# Altium PCB WS2812B灯板.PcbDoc (part 2 of 2)
Units mm, origin at the board's own origin, x right, y up, seen from the top; angles counter-clockwise.
Board outline 76.86 x 65 mm, 2 copper layers (Top Layer, Bottom Layer); 100 components, 337 nets, 606 pads, 0 vias.
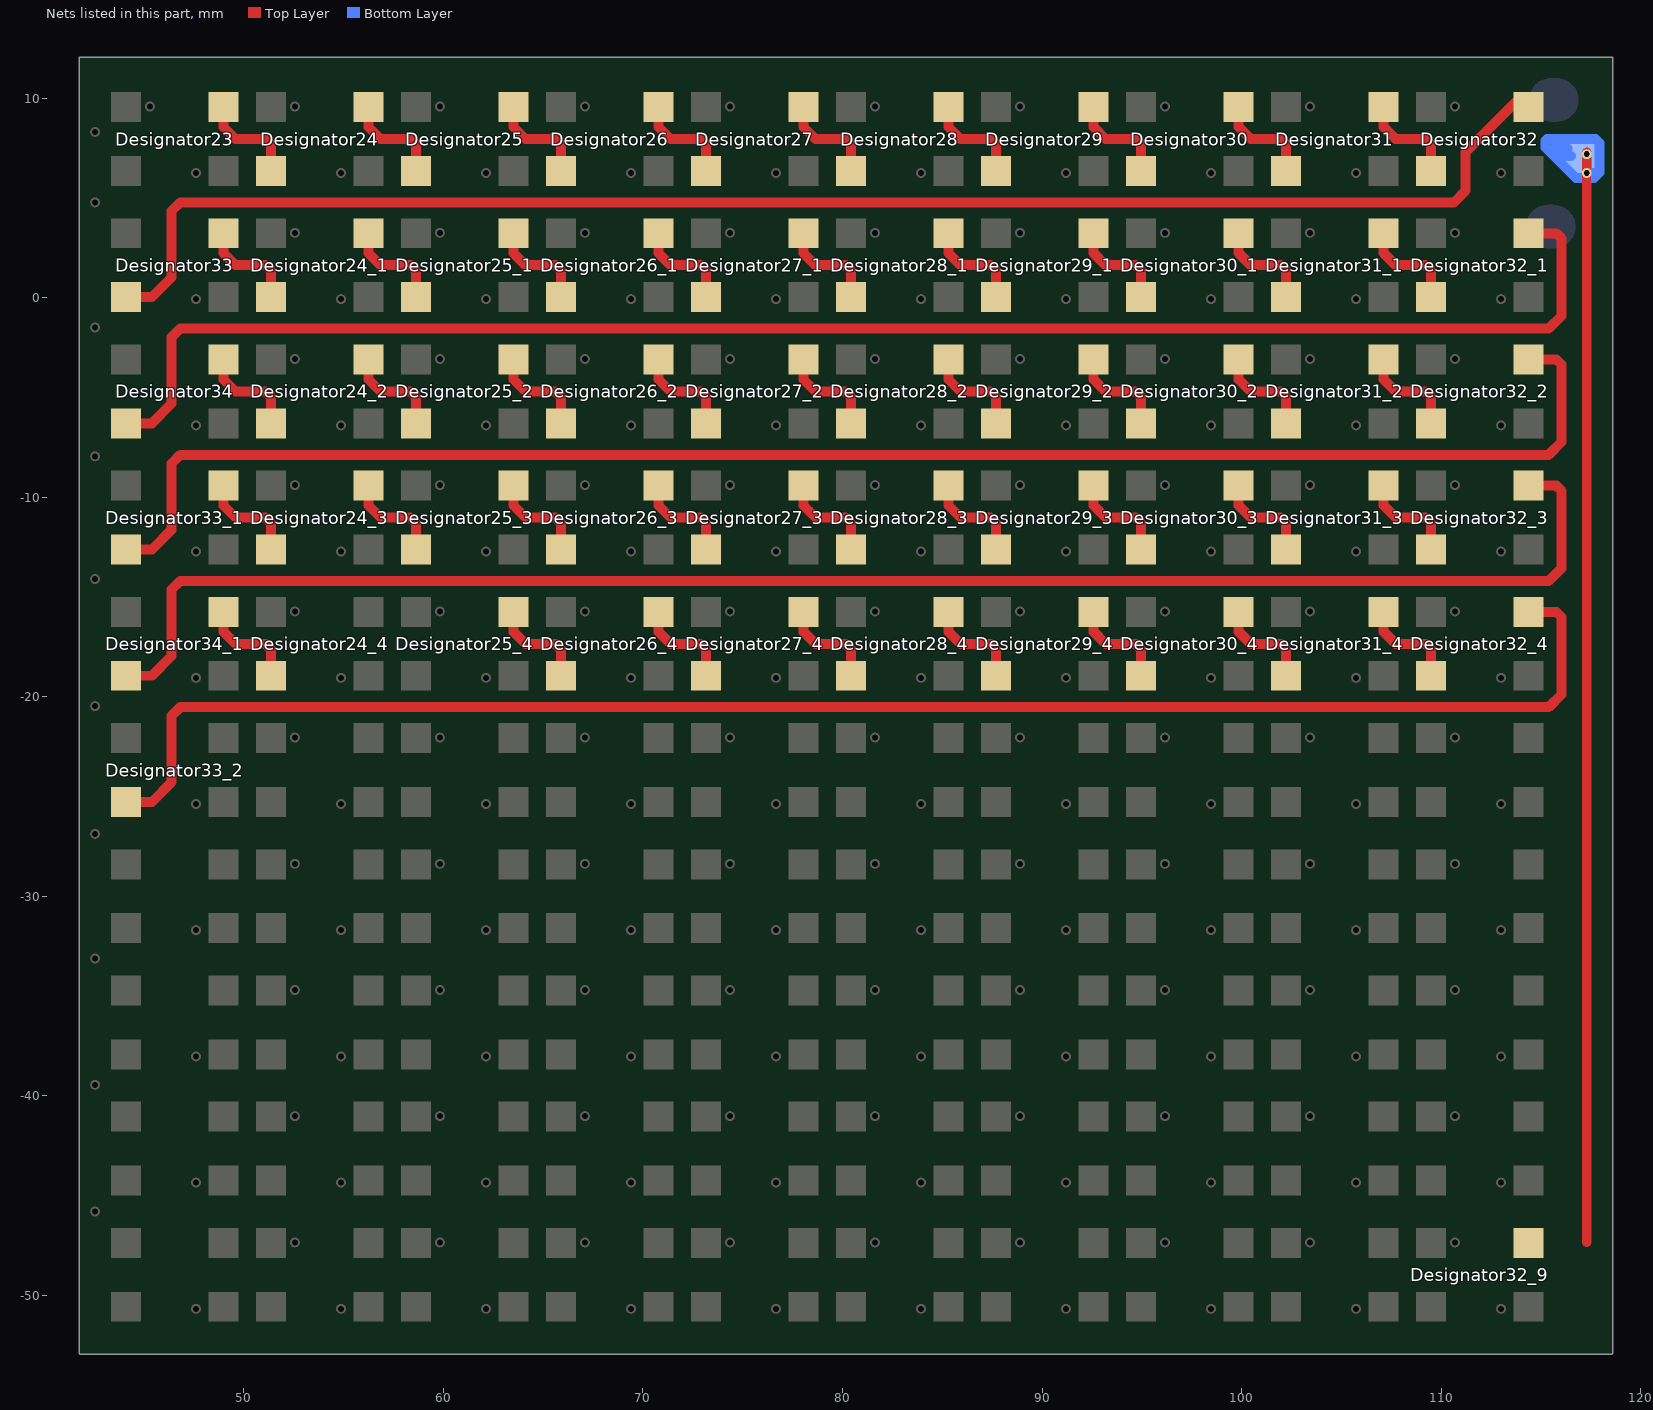
[diagram p2: the nets of this part, all layers, seen from the top]

## Nets (pads, with @x,y where several pads share a name; then routed paths per layer and width w, separated by ;. In a path a pad name is that pad's centre, name@x,y a point inside that pad or via, vN(x,y) a via of type N, cw(c..) or ccw(c..) an arc to the next point about the centre after c; other vN are vias at no path point) (continued)
NewNet67: Designator24_4.DOUT Designator34_1.DIN | length 5.1
  Top Layer w0.5: Designator34_1.DIN@48.983,-15.748 48.983,-16.747 49.584,-17.348 51.082,-17.348 51.35,-17.616 Designator24_4.DOUT@51.35,-18.948
NewNet68: Designator25_4.DIN Designator26_4.DOUT | length 5.1
  Top Layer w0.5: Designator25_4.DIN@63.517,-15.748 63.517,-16.747 64.118,-17.348 65.617,-17.348 65.884,-17.616 Designator26_4.DOUT@65.884,-18.948
NewNet69: Designator26_4.DIN Designator27_4.DOUT | length 5.1
  Top Layer w0.5: Designator26_4.DIN@70.784,-15.748 70.784,-16.747 71.385,-17.348 72.884,-17.348 73.152,-17.616 Designator27_4.DOUT@73.152,-18.948
NewNet70: Designator27_4.DIN Designator28_4.DOUT | length 5.1
  Top Layer w0.5: Designator27_4.DIN@78.052,-15.748 78.052,-16.747 78.653,-17.348 80.151,-17.348 80.419,-17.616 Designator28_4.DOUT@80.419,-18.948
NewNet71: Designator28_4.DIN Designator29_4.DOUT | length 5.1
  Top Layer w0.5: Designator28_4.DIN@85.319,-15.748 85.319,-16.747 85.92,-17.348 87.418,-17.348 87.686,-17.616 Designator29_4.DOUT@87.686,-18.948
NewNet72: Designator29_4.DIN Designator30_4.DOUT | length 5.1
  Top Layer w0.5: Designator29_4.DIN@92.586,-15.748 92.586,-16.747 93.187,-17.348 94.686,-17.348 94.953,-17.616 Designator30_4.DOUT@94.953,-18.948
NewNet73: Designator30_4.DIN Designator31_4.DOUT | length 5.1
  Top Layer w0.5: Designator30_4.DIN@99.853,-15.748 99.853,-16.747 100.454,-17.348 101.953,-17.348 102.221,-17.616 Designator31_4.DOUT@102.221,-18.948
NewNet74: Designator31_4.DIN Designator32_4.DOUT | length 5.1
  Top Layer w0.5: Designator31_4.DIN@107.121,-15.748 107.121,-16.747 107.721,-17.348 109.22,-17.348 109.488,-17.616 Designator32_4.DOUT@109.488,-18.948
NewNet75: Designator32_4.DIN Designator33_2.DOUT | length 81.8
  Top Layer w0.5: Designator33_2.DOUT@44.083,-25.273 45.39,-25.273 46.38,-24.282 46.38,-20.955 46.812,-20.523 115.392,-20.523 116.027,-19.888 116.027,-16.002 115.773,-15.748 Designator32_4.DIN@114.388,-15.748
NewNet76: Designator24_3.DIN Designator25_3.DOUT | length 5.1
  Top Layer w0.5: Designator24_3.DIN@56.25,-9.424 56.25,-10.423 56.851,-11.024 58.349,-11.024 58.617,-11.291 Designator25_3.DOUT@58.617,-12.624
NewNet77: Designator24_3.DOUT Designator33_1.DIN | length 5.1
  Top Layer w0.5: Designator33_1.DIN@48.983,-9.424 48.983,-10.423 49.584,-11.024 51.082,-11.024 51.35,-11.291 Designator24_3.DOUT@51.35,-12.624
NewNet78: Designator25_3.DIN Designator26_3.DOUT | length 5.1
  Top Layer w0.5: Designator25_3.DIN@63.517,-9.424 63.517,-10.423 64.118,-11.024 65.617,-11.024 65.884,-11.291 Designator26_3.DOUT@65.884,-12.624
NewNet79: Designator26_3.DIN Designator27_3.DOUT | length 5.1
  Top Layer w0.5: Designator26_3.DIN@70.784,-9.424 70.784,-10.423 71.385,-11.024 72.884,-11.024 73.152,-11.291 Designator27_3.DOUT@73.152,-12.624
NewNet80: Designator27_3.DIN Designator28_3.DOUT | length 5.1
  Top Layer w0.5: Designator27_3.DIN@78.052,-9.424 78.052,-10.423 78.653,-11.024 80.151,-11.024 80.419,-11.291 Designator28_3.DOUT@80.419,-12.624
NewNet81: Designator28_3.DIN Designator29_3.DOUT | length 5.1
  Top Layer w0.5: Designator28_3.DIN@85.319,-9.424 85.319,-10.423 85.92,-11.024 87.418,-11.024 87.686,-11.291 Designator29_3.DOUT@87.686,-12.624
NewNet82: Designator29_3.DIN Designator30_3.DOUT | length 5.1
  Top Layer w0.5: Designator29_3.DIN@92.586,-9.424 92.586,-10.423 93.187,-11.024 94.686,-11.024 94.953,-11.291 Designator30_3.DOUT@94.953,-12.624
NewNet83: Designator30_3.DIN Designator31_3.DOUT | length 5.1
  Top Layer w0.5: Designator30_3.DIN@99.853,-9.424 99.853,-10.423 100.454,-11.024 101.953,-11.024 102.221,-11.291 Designator31_3.DOUT@102.221,-12.624
NewNet84: Designator31_3.DIN Designator32_3.DOUT | length 5.1
  Top Layer w0.5: Designator31_3.DIN@107.121,-9.424 107.121,-10.423 107.721,-11.024 109.22,-11.024 109.488,-11.291 Designator32_3.DOUT@109.488,-12.624
NewNet85: Designator32_3.DIN Designator34_1.DOUT | length 81.8
  Top Layer w0.5: Designator34_1.DOUT@44.083,-18.948 45.39,-18.948 46.38,-17.958 46.38,-14.63 46.812,-14.199 115.392,-14.199 116.027,-13.564 116.027,-9.677 115.773,-9.424 Designator32_3.DIN@114.388,-9.424
NewNet86: Designator24_2.DIN Designator25_2.DOUT | length 5.1
  Top Layer w0.5: Designator24_2.DIN@56.25,-3.099 56.25,-4.098 56.851,-4.699 58.349,-4.699 58.617,-4.967 Designator25_2.DOUT@58.617,-6.299
NewNet87: Designator24_2.DOUT Designator34.DIN | length 5.1
  Top Layer w0.5: Designator34.DIN@48.983,-3.099 48.983,-4.098 49.584,-4.699 51.082,-4.699 51.35,-4.967 Designator24_2.DOUT@51.35,-6.299
NewNet88: Designator25_2.DIN Designator26_2.DOUT | length 5.1
  Top Layer w0.5: Designator25_2.DIN@63.517,-3.099 63.517,-4.098 64.118,-4.699 65.617,-4.699 65.884,-4.967 Designator26_2.DOUT@65.884,-6.299
NewNet89: Designator26_2.DIN Designator27_2.DOUT | length 5.1
  Top Layer w0.5: Designator26_2.DIN@70.784,-3.099 70.784,-4.098 71.385,-4.699 72.884,-4.699 73.152,-4.967 Designator27_2.DOUT@73.152,-6.299
NewNet90: Designator27_2.DIN Designator28_2.DOUT | length 5.1
  Top Layer w0.5: Designator27_2.DIN@78.052,-3.099 78.052,-4.098 78.653,-4.699 80.151,-4.699 80.419,-4.967 Designator28_2.DOUT@80.419,-6.299
NewNet91: Designator28_2.DIN Designator29_2.DOUT | length 5.1
  Top Layer w0.5: Designator28_2.DIN@85.319,-3.099 85.319,-4.098 85.92,-4.699 87.418,-4.699 87.686,-4.967 Designator29_2.DOUT@87.686,-6.299
NewNet92: Designator29_2.DIN Designator30_2.DOUT | length 5.1
  Top Layer w0.5: Designator29_2.DIN@92.586,-3.099 92.586,-4.098 93.187,-4.699 94.686,-4.699 94.953,-4.967 Designator30_2.DOUT@94.953,-6.299
NewNet93: Designator30_2.DIN Designator31_2.DOUT | length 5.1
  Top Layer w0.5: Designator30_2.DIN@99.853,-3.099 99.853,-4.098 100.454,-4.699 101.953,-4.699 102.221,-4.967 Designator31_2.DOUT@102.221,-6.299
NewNet94: Designator31_2.DIN Designator32_2.DOUT | length 5.1
  Top Layer w0.5: Designator31_2.DIN@107.121,-3.099 107.121,-4.098 107.721,-4.699 109.22,-4.699 109.488,-4.967 Designator32_2.DOUT@109.488,-6.299
NewNet95: Designator32_2.DIN Designator33_1.DOUT | length 81.8
  Top Layer w0.5: Designator33_1.DOUT@44.083,-12.624 45.39,-12.624 46.38,-11.633 46.38,-8.306 46.812,-7.874 115.392,-7.874 116.027,-7.239 116.027,-3.353 115.773,-3.099 Designator32_2.DIN@114.388,-3.099
NewNet96: Designator24_1.DIN Designator25_1.DOUT | length 5.1
  Top Layer w0.5: Designator24_1.DIN@56.25,3.226 56.25,2.226 56.851,1.626 58.349,1.626 58.617,1.358 Designator25_1.DOUT@58.617,0.026
NewNet97: Designator24_1.DOUT Designator33.DIN | length 5.1
  Top Layer w0.5: Designator33.DIN@48.983,3.226 48.983,2.226 49.584,1.626 51.082,1.626 51.35,1.358 Designator24_1.DOUT@51.35,0.026
NewNet98: Designator25_1.DIN Designator26_1.DOUT | length 5.1
  Top Layer w0.5: Designator25_1.DIN@63.517,3.226 63.517,2.226 64.118,1.626 65.617,1.626 65.884,1.358 Designator26_1.DOUT@65.884,0.026
NewNet99: Designator26_1.DIN Designator27_1.DOUT | length 5.1
  Top Layer w0.5: Designator26_1.DIN@70.784,3.226 70.784,2.226 71.385,1.626 72.884,1.626 73.152,1.358 Designator27_1.DOUT@73.152,0.026
NewNet100: Designator27_1.DIN Designator28_1.DOUT | length 5.1
  Top Layer w0.5: Designator27_1.DIN@78.052,3.226 78.052,2.226 78.653,1.626 80.151,1.626 80.419,1.358 Designator28_1.DOUT@80.419,0.026
NewNet101: Designator28_1.DIN Designator29_1.DOUT | length 5.1
  Top Layer w0.5: Designator28_1.DIN@85.319,3.226 85.319,2.226 85.92,1.626 87.418,1.626 87.686,1.358 Designator29_1.DOUT@87.686,0.026
NewNet102: Designator29_1.DIN Designator30_1.DOUT | length 5.1
  Top Layer w0.5: Designator29_1.DIN@92.586,3.226 92.586,2.226 93.187,1.626 94.686,1.626 94.953,1.358 Designator30_1.DOUT@94.953,0.026
NewNet103: Designator30_1.DIN Designator31_1.DOUT | length 5.1
  Top Layer w0.5: Designator30_1.DIN@99.853,3.226 99.853,2.226 100.454,1.626 101.953,1.626 102.221,1.358 Designator31_1.DOUT@102.221,0.026
NewNet104: Designator31_1.DIN Designator32_1.DOUT | length 5.1
  Top Layer w0.5: Designator31_1.DIN@107.121,3.226 107.121,2.226 107.721,1.626 109.22,1.626 109.488,1.358 Designator32_1.DOUT@109.488,0.026
NewNet105: Designator32_1.DIN Designator34.DOUT | length 81.8
  Top Layer w0.5: Designator34.DOUT@44.083,-6.299 45.39,-6.299 46.38,-5.309 46.38,-1.981 46.812,-1.549 115.392,-1.549 116.027,-0.914 116.027,2.972 115.773,3.226 Designator32_1.DIN@114.388,3.226
NewNet106: Designator32.DIN Designator33.DOUT | length 76.9
  Top Layer w0.5: Designator33.DOUT@44.083,0.026 45.39,0.026 46.38,1.016 46.38,4.343 46.812,4.775 110.642,4.775 111.227,5.359 111.227,7.29 Designator32.DIN@113.792,9.855
NewNet107: Designator31.DIN Designator32.DOUT | length 5.1
  Top Layer w0.5: Designator31.DIN@107.121,9.55 107.121,8.551 107.721,7.95 109.22,7.95 109.488,7.682 Designator32.DOUT@109.488,6.35
NewNet108: Designator30.DIN Designator31.DOUT | length 5.1
  Top Layer w0.5: Designator30.DIN@99.853,9.55 99.853,8.551 100.454,7.95 101.953,7.95 102.221,7.682 Designator31.DOUT@102.221,6.35
NewNet109: Designator29.DIN Designator30.DOUT | length 5.1
  Top Layer w0.5: Designator29.DIN@92.586,9.55 92.586,8.551 93.187,7.95 94.686,7.95 94.953,7.682 Designator30.DOUT@94.953,6.35
NewNet110: Designator28.DIN Designator29.DOUT | length 5.1
  Top Layer w0.5: Designator28.DIN@85.319,9.55 85.319,8.551 85.92,7.95 87.418,7.95 87.686,7.682 Designator29.DOUT@87.686,6.35
NewNet111: Designator27.DIN Designator28.DOUT | length 5.1
  Top Layer w0.5: Designator27.DIN@78.052,9.55 78.052,8.551 78.653,7.95 80.151,7.95 80.419,7.682 Designator28.DOUT@80.419,6.35
NewNet112: Designator26.DIN Designator27.DOUT | length 5.1
  Top Layer w0.5: Designator26.DIN@70.784,9.55 70.784,8.551 71.385,7.95 72.884,7.95 73.152,7.682 Designator27.DOUT@73.152,6.35
NewNet113: Designator25.DIN Designator26.DOUT | length 5.1
  Top Layer w0.5: Designator25.DIN@63.517,9.55 63.517,8.551 64.118,7.95 65.617,7.95 65.884,7.682 Designator26.DOUT@65.884,6.35
NewNet114: Designator24.DIN Designator25.DOUT | length 5.1
  Top Layer w0.5: Designator24.DIN@56.25,9.55 56.25,8.551 56.851,7.95 58.349,7.95 58.617,7.682 Designator25.DOUT@58.617,6.35
NewNet115: Designator23.DIN Designator24.DOUT | length 5.1
  Top Layer w0.5: Designator23.DIN@48.983,9.55 48.983,8.551 49.584,7.95 51.082,7.95 51.35,7.682 Designator24.DOUT@51.35,6.35
NewNet116: Designator32_9.DIN pad.3@117.018,7.137 pad.5 | length 64.6
  Top Layer w0.5: 117.297,-47.32 pad.5@117.297,7.264
  Bottom Layer w0.5: 115.621,7.468 pad.3@116.332,7.468 ; 115.875,7.087 pad.3@116.51,7.087 ; pad.5@117.297,6.248 117.907,6.248 ; 115.24,7.518 115.24,7.874 115.316,7.95 115.926,7.95 117.729,7.95 117.932,7.747 117.932,6.274 117.653,5.994 116.764,5.994 115.24,7.518
NewNet117: 
NewNet118: 
NewNet119: 
NewNet120: 
NewNet121: 
NewNet122: 
NewNet123: 
NewNet124: 
NewNet125: 
NewNet126: 
NewNet127: 
NewNet128: 
NewNet129: 
NewNet130: 
NewNet131: 
NewNet132: 
NewNet133: 
NewNet134: 
NewNet135: 
NewNet136: 
NewNet137: 
NewNet138: 
NewNet139: 
NewNet140: 
NewNet141: 
NewNet142: 
NewNet143: 
NewNet144: 
NewNet145: 
NewNet146: 
NewNet147: 
NewNet148: 
NewNet149: 
NewNet150: 
NewNet151: 
NewNet152: 
NewNet153: 
NewNet154: 
NewNet155: 
NewNet156: 
NewNet157: 
NewNet158: 
NewNet159: 
NewNet160: 
NewNet161: 
NewNet162: 
NewNet163: 
NewNet164: 
NewNet165: 
NewNet166: 
NewNet167: 
NewNet168: 
NewNet169: 
NewNet170: 
NewNet171: 
NewNet172: 
NewNet173: 
NewNet174: 
NewNet175: 
NewNet176: 
NewNet177: 
NewNet178: 
NewNet179: 
NewNet180: 
NewNet181: 
NewNet182: 
NewNet183: 
NewNet184: 
NewNet185: 
NewNet186: 
NewNet187: 
NewNet188: 
NewNet189: 
NewNet190: 
NewNet191: 
NewNet192: 
NewNet193: 
NewNet194: 
NewNet195: 
NewNet196: 
NewNet197: 
NewNet198: 
NewNet199: 
NewNet200: 
NewNet201: 
NewNet202: 
NewNet203: 
NewNet204: 
NewNet205: 
NewNet206: 
NewNet207: 
NewNet208: 
NewNet209: 
NewNet210: 
NewNet211: 
NewNet212: 
NewNet213: 
NewNet214: 
NewNet215: 
NewNet216: 
NewNet217: 
NewNet218: 
NewNet219: 
NewNet220: 
NewNet221: 
NewNet222: 
NewNet223: 
NewNet224: 
NewNet225: 
NewNet226: 
NewNet227: 
NewNet228: 
NewNet229: 
NewNet230: 
NewNet231: 
NewNet232: 
NewNet233: 
NewNet234: 
NewNet235: 
NewNet236: 
NewNet237: 
NewNet238: 
NewNet239: 
NewNet240: 
NewNet241: 
NewNet242: 
NewNet243: 
NewNet244: 
NewNet245: 
NewNet246: 
NewNet247: 
NewNet248: 
NewNet249: 
NewNet250: 
NewNet251: 
NewNet252: 
NewNet253: 
NewNet254: 
NewNet255: 
NewNet256: 
NewNet257: 
NewNet258: 
NewNet259: 
NewNet260: 
NewNet261: 
NewNet262: 
NewNet263: 
NewNet264: 
NewNet265: 
NewNet266: 
NewNet267: 
NewNet268: 
NewNet269: 
NewNet270: 
NewNet271: 
NewNet272: 
NewNet273: 
NewNet274: 
NewNet275: 
NewNet276: 
NewNet277: 
NewNet278: 
NewNet279: 
NewNet280: 
NewNet281: 
NewNet282: 
NewNet283: 
NewNet284: 
NewNet285: 
NewNet286: 
NewNet287: 
NewNet288: 
NewNet289: 
NewNet290: 
NewNet291: 
NewNet292: 
NewNet293: 
NewNet294: 
NewNet295: 
NewNet296: 
NewNet297: 
NewNet298: 
NewNet299: 
NewNet300: 
NewNet301: 
NewNet302: 
NewNet303: 
NewNet304: 
NewNet305: 
NewNet306: 
NewNet307: 
NewNet308: 
NewNet309: 
NewNet310: 
NewNet311: 
NewNet312: 
NewNet313: 
NewNet314: 
NewNet315: 
NewNet316: 
NewNet317: 
NewNet318: 
NewNet319: 
NewNet320: 
NewNet321: 
NewNet322: 
NewNet323: 
NewNet324: 
NewNet325: 
NewNet326: 
NewNet327: 
NewNet328: 
NewNet329: 
NewNet330: 
NewNet331: 
NewNet332: 
NewNet333: 
NewNet334: 
NewNet335: 
NewNet336: 
NewNet337: 
pads on no net: Designator23.DOUT

## Other copper
Top Layer:
  rectangle net NewNet15: 109.423,8.788 111.379,10.338
  rectangle net NewNet15: 102.156,8.788 104.112,10.338
  rectangle net NewNet15: 94.889,8.788 96.845,10.338
  rectangle net NewNet15: 87.622,8.788 89.577,10.338
  rectangle net NewNet15: 80.354,8.788 82.31,10.338
  rectangle net NewNet15: 73.087,8.788 75.043,10.338
  rectangle net NewNet15: 65.82,8.788 67.776,10.338
  rectangle net NewNet15: 58.553,8.788 60.508,10.338
  rectangle net NewNet15: 51.285,8.788 53.241,10.338
  rectangle net NewNet15: 44.018,8.788 45.974,10.338
  rectangle net NewNet116: 114.478,-48.311 117.831,-46.736
  rectangle net NewNet18: 112.192,5.639 114.452,7.112
  rectangle net NewNet18: 104.925,5.639 107.185,7.112
  rectangle net NewNet18: 97.657,5.639 99.918,7.112
  rectangle net NewNet18: 90.39,5.639 92.651,7.112
  rectangle net NewNet18: 83.123,5.639 85.384,7.112
  rectangle net NewNet18: 75.856,5.639 78.116,7.112
  rectangle net NewNet18: 68.588,5.639 70.849,7.112
  rectangle net NewNet18: 61.321,5.639 63.582,7.112
  rectangle net NewNet18: 54.054,5.639 56.315,7.112
  rectangle net NewNet18: 47.117,5.639 49.047,7.112
  rectangle net NewNet18: 112.192,-0.686 114.452,0.787
  rectangle net NewNet18: 104.925,-0.686 107.185,0.787
  rectangle net NewNet18: 97.657,-0.686 99.918,0.787
  rectangle net NewNet18: 90.39,-0.686 92.651,0.787
  rectangle net NewNet18: 83.123,-0.686 85.384,0.787
  rectangle net NewNet18: 75.856,-0.686 78.116,0.787
  rectangle net NewNet18: 68.588,-0.686 70.849,0.787
  rectangle net NewNet18: 61.321,-0.686 63.582,0.787
  rectangle net NewNet18: 54.054,-0.686 56.315,0.787
  rectangle net NewNet18: 47.117,-0.686 49.047,0.787
  rectangle net NewNet18: 112.192,-7.01 114.452,-5.537
  rectangle net NewNet18: 104.925,-7.01 107.185,-5.537
  rectangle net NewNet18: 97.657,-7.01 99.918,-5.537
  rectangle net NewNet18: 90.39,-7.01 92.651,-5.537
  rectangle net NewNet18: 83.123,-7.01 85.384,-5.537
  rectangle net NewNet18: 75.856,-7.01 78.116,-5.537
  rectangle net NewNet18: 68.588,-7.01 70.849,-5.537
  rectangle net NewNet18: 61.321,-7.01 63.582,-5.537
  rectangle net NewNet18: 54.054,-7.01 56.315,-5.537
  rectangle net NewNet18: 47.117,-7.01 49.047,-5.537
  rectangle net NewNet18: 112.192,-13.335 114.452,-11.862
  rectangle net NewNet18: 104.925,-13.335 107.185,-11.862
  rectangle net NewNet18: 97.657,-13.335 99.918,-11.862
  rectangle net NewNet18: 90.39,-13.335 92.651,-11.862
  rectangle net NewNet18: 83.123,-13.335 85.384,-11.862
  rectangle net NewNet18: 75.856,-13.335 78.116,-11.862
  rectangle net NewNet18: 68.588,-13.335 70.849,-11.862
  rectangle net NewNet18: 61.321,-13.335 63.582,-11.862
  rectangle net NewNet18: 54.054,-13.335 56.315,-11.862
  rectangle net NewNet18: 47.117,-13.335 49.047,-11.862
  rectangle net NewNet18: 112.192,-19.66 114.452,-18.186
  rectangle net NewNet18: 104.925,-19.66 107.185,-18.186
  rectangle net NewNet18: 97.657,-19.66 99.918,-18.186
  rectangle net NewNet18: 90.39,-19.66 92.651,-18.186
  rectangle net NewNet18: 83.123,-19.66 85.384,-18.186
  rectangle net NewNet18: 75.856,-19.66 78.116,-18.186
  rectangle net NewNet18: 68.588,-19.66 70.849,-18.186
  rectangle net NewNet18: 61.321,-19.66 63.582,-18.186
  rectangle net NewNet18: 54.054,-19.66 56.315,-18.186
  rectangle net NewNet18: 47.117,-19.66 49.047,-18.186
  rectangle net NewNet18: 112.192,-25.984 114.452,-24.511
  rectangle net NewNet18: 104.925,-25.984 107.185,-24.511
  rectangle net NewNet18: 97.657,-25.984 99.918,-24.511
  rectangle net NewNet18: 90.39,-25.984 92.651,-24.511
  rectangle net NewNet18: 83.123,-25.984 85.384,-24.511
  rectangle net NewNet18: 75.856,-25.984 78.116,-24.511
  rectangle net NewNet18: 68.588,-25.984 70.849,-24.511
  rectangle net NewNet18: 61.321,-25.984 63.582,-24.511
  rectangle net NewNet18: 54.054,-25.984 56.315,-24.511
  rectangle net NewNet18: 47.117,-25.984 49.047,-24.511
  rectangle net NewNet18: 112.192,-32.309 114.452,-30.836
  rectangle net NewNet18: 104.925,-32.309 107.185,-30.836
  rectangle net NewNet18: 97.657,-32.309 99.918,-30.836
  rectangle net NewNet18: 90.39,-32.309 92.651,-30.836
  rectangle net NewNet18: 83.123,-32.309 85.384,-30.836
  rectangle net NewNet18: 75.856,-32.309 78.116,-30.836
  rectangle net NewNet18: 68.588,-32.309 70.849,-30.836
  rectangle net NewNet18: 61.321,-32.309 63.582,-30.836
  rectangle net NewNet18: 54.054,-32.309 56.315,-30.836
  rectangle net NewNet18: 47.117,-32.309 49.047,-30.836
  rectangle net NewNet18: 112.192,-38.633 114.452,-37.16
  rectangle net NewNet18: 104.925,-38.633 107.185,-37.16
  rectangle net NewNet18: 97.657,-38.633 99.918,-37.16
  rectangle net NewNet18: 90.39,-38.633 92.651,-37.16
  rectangle net NewNet18: 83.123,-38.633 85.384,-37.16
  rectangle net NewNet18: 75.856,-38.633 78.116,-37.16
  rectangle net NewNet18: 68.588,-38.633 70.849,-37.16
  rectangle net NewNet18: 61.321,-38.633 63.582,-37.16
  rectangle net NewNet18: 54.054,-38.633 56.315,-37.16
  rectangle net NewNet18: 47.117,-38.633 49.047,-37.16
  rectangle net NewNet18: 112.192,-51.283 114.452,-49.809
  rectangle net NewNet18: 104.925,-51.283 107.185,-49.809
  rectangle net NewNet18: 97.657,-51.283 99.918,-49.809
  rectangle net NewNet18: 90.39,-51.283 92.651,-49.809
  rectangle net NewNet18: 83.123,-51.283 85.384,-49.809
  rectangle net NewNet18: 75.856,-51.283 78.116,-49.809
  rectangle net NewNet18: 68.588,-51.283 70.849,-49.809
  rectangle net NewNet18: 61.321,-51.283 63.582,-49.809
  rectangle net NewNet18: 54.054,-51.283 56.315,-49.809
  rectangle net NewNet18: 47.117,-51.283 49.047,-49.809
  rectangle net NewNet18: 47.117,-44.958 49.047,-43.485
  rectangle net NewNet18: 54.054,-44.958 56.315,-43.485
  rectangle net NewNet18: 61.321,-44.958 63.582,-43.485
  rectangle net NewNet18: 68.588,-44.958 70.849,-43.485
  rectangle net NewNet18: 75.856,-44.958 78.116,-43.485
  rectangle net NewNet18: 83.123,-44.958 85.384,-43.485
  rectangle net NewNet18: 90.39,-44.958 92.651,-43.485
  rectangle net NewNet18: 97.657,-44.958 99.918,-43.485
  rectangle net NewNet18: 104.925,-44.958 107.185,-43.485
  rectangle net NewNet18: 112.192,-44.958 114.452,-43.485
  rectangle net NewNet15: 109.423,2.464 111.379,4.013
  rectangle net NewNet15: 102.156,2.464 104.112,4.013
  rectangle net NewNet15: 87.622,2.464 89.577,4.013
  rectangle net NewNet15: 80.354,2.464 82.31,4.013
  rectangle net NewNet15: 73.087,2.464 75.043,4.013
  rectangle net NewNet15: 65.82,2.464 67.776,4.013
  rectangle net NewNet15: 58.553,2.464 60.508,4.013
  rectangle net NewNet15: 51.285,2.464 53.241,4.013
  rectangle net NewNet15: 94.889,2.464 96.845,4.013
  rectangle net NewNet15: 109.423,-3.861 111.379,-2.311
  rectangle net NewNet15: 102.156,-3.861 104.112,-2.311
  rectangle net NewNet15: 87.622,-3.861 89.577,-2.311
  rectangle net NewNet15: 80.354,-3.861 82.31,-2.311
  rectangle net NewNet15: 73.087,-3.861 75.043,-2.311
  rectangle net NewNet15: 65.82,-3.861 67.776,-2.311
  rectangle net NewNet15: 58.553,-3.861 60.508,-2.311
  rectangle net NewNet15: 51.285,-3.861 53.241,-2.311
  rectangle net NewNet15: 94.889,-3.861 96.845,-2.311
  rectangle net NewNet15: 109.423,-10.185 111.379,-8.636
  rectangle net NewNet15: 102.156,-10.185 104.112,-8.636
  rectangle net NewNet15: 87.622,-10.185 89.577,-8.636
  rectangle net NewNet15: 80.354,-10.185 82.31,-8.636
  rectangle net NewNet15: 73.087,-10.185 75.043,-8.636
  rectangle net NewNet15: 65.82,-10.185 67.776,-8.636
  rectangle net NewNet15: 58.553,-10.185 60.508,-8.636
  rectangle net NewNet15: 51.285,-10.185 53.241,-8.636
  rectangle net NewNet15: 94.889,-10.185 96.845,-8.636
  rectangle net NewNet15: 109.423,-16.51 111.379,-14.961
  rectangle net NewNet15: 102.156,-16.51 104.112,-14.961
  rectangle net NewNet15: 87.622,-16.51 89.577,-14.961
  rectangle net NewNet15: 80.354,-16.51 82.31,-14.961
  rectangle net NewNet15: 73.087,-16.51 75.043,-14.961
  rectangle net NewNet15: 65.82,-16.51 67.776,-14.961
  rectangle net NewNet15: 58.553,-16.51 60.508,-14.961
  rectangle net NewNet15: 51.285,-16.51 53.241,-14.961
  rectangle net NewNet15: 94.889,-16.51 96.845,-14.961
  rectangle net NewNet15: 109.423,-22.835 111.379,-21.285
  rectangle net NewNet15: 102.156,-22.835 104.112,-21.285
  rectangle net NewNet15: 87.622,-22.835 89.577,-21.285
  rectangle net NewNet15: 80.354,-22.835 82.31,-21.285
  rectangle net NewNet15: 73.087,-22.835 75.043,-21.285
  rectangle net NewNet15: 65.82,-22.835 67.776,-21.285
  rectangle net NewNet15: 58.553,-22.835 60.508,-21.285
  rectangle net NewNet15: 51.285,-22.835 53.241,-21.285
  rectangle net NewNet15: 94.889,-22.835 96.845,-21.285
  rectangle net NewNet15: 109.423,-29.159 111.379,-27.61
  rectangle net NewNet15: 102.156,-29.159 104.112,-27.61
  rectangle net NewNet15: 87.622,-29.159 89.577,-27.61
  rectangle net NewNet15: 80.354,-29.159 82.31,-27.61
  rectangle net NewNet15: 73.087,-29.159 75.043,-27.61
  rectangle net NewNet15: 65.82,-29.159 67.776,-27.61
  rectangle net NewNet15: 58.553,-29.159 60.508,-27.61
  rectangle net NewNet15: 51.285,-29.159 53.241,-27.61
  rectangle net NewNet15: 94.889,-29.159 96.845,-27.61
  rectangle net NewNet15: 109.423,-35.484 111.379,-33.934
  rectangle net NewNet15: 102.156,-35.484 104.112,-33.934
  rectangle net NewNet15: 87.622,-35.484 89.577,-33.934
  rectangle net NewNet15: 80.354,-35.484 82.31,-33.934
  rectangle net NewNet15: 73.087,-35.484 75.043,-33.934
  rectangle net NewNet15: 65.82,-35.484 67.776,-33.934
  rectangle net NewNet15: 58.553,-35.484 60.508,-33.934
  rectangle net NewNet15: 51.285,-35.484 53.241,-33.934
  rectangle net NewNet15: 94.889,-35.484 96.845,-33.934
  rectangle net NewNet15: 109.423,-41.808 111.379,-40.259
  rectangle net NewNet15: 102.156,-41.808 104.112,-40.259
  rectangle net NewNet15: 87.622,-41.808 89.577,-40.259
  rectangle net NewNet15: 80.354,-41.808 82.31,-40.259
  rectangle net NewNet15: 73.087,-41.808 75.043,-40.259
  rectangle net NewNet15: 65.82,-41.808 67.776,-40.259
  rectangle net NewNet15: 58.553,-41.808 60.508,-40.259
  rectangle net NewNet15: 51.285,-41.808 53.241,-40.259
  rectangle net NewNet15: 94.889,-41.808 96.845,-40.259
  rectangle net NewNet15: 94.889,-48.133 96.845,-46.584
  rectangle net NewNet15: 51.285,-48.133 53.241,-46.584
  rectangle net NewNet15: 58.553,-48.133 60.508,-46.584
  rectangle net NewNet15: 65.82,-48.133 67.776,-46.584
  rectangle net NewNet15: 73.087,-48.133 75.043,-46.584
  rectangle net NewNet15: 80.354,-48.133 82.31,-46.584
  rectangle net NewNet15: 87.622,-48.133 89.577,-46.584
  rectangle net NewNet15: 102.156,-48.133 104.112,-46.584
  rectangle net NewNet15: 109.423,-48.133 111.379,-46.584
  rectangle net NewNet15: 50.6,8.992 52.022,11.303
  rectangle net NewNet15: 57.867,8.992 59.289,11.303
  rectangle net NewNet15: 65.134,8.992 66.556,11.303
  rectangle net NewNet15: 72.401,8.992 73.824,11.303
  rectangle net NewNet15: 79.669,8.992 81.091,11.303
  rectangle net NewNet15: 86.936,8.992 88.358,11.303
  rectangle net NewNet15: 94.203,8.992 95.625,11.303
  rectangle net NewNet15: 101.47,8.992 102.893,11.303
  rectangle net NewNet15: 108.737,8.992 110.16,11.303
  rectangle net NewNet15: 42.342,8.814 44.78,11.176
  rectangle net NewNet15: 42.342,2.489 44.78,4.039
  rectangle net NewNet15: 42.342,-3.835 44.78,-2.286
  rectangle net NewNet15: 42.342,-10.16 44.78,-8.611
  rectangle net NewNet15: 42.342,-16.485 44.78,-14.935
  rectangle net NewNet15: 42.342,-22.809 44.78,-21.26
  rectangle net NewNet15: 42.342,-29.134 44.78,-27.584
  rectangle net NewNet15: 42.342,-35.458 44.78,-33.909
  rectangle net NewNet15: 42.342,-41.783 44.78,-40.234
  rectangle net NewNet15: 42.342,-48.108 44.78,-46.558
  rectangle net NewNet18: 48.263,-52.4 49.711,-49.86
  rectangle net NewNet18: 55.53,-52.375 56.978,-49.835
  rectangle net NewNet18: 62.797,-52.375 64.245,-49.835
  rectangle net NewNet18: 70.064,-52.375 71.512,-49.835
  rectangle net NewNet18: 77.332,-52.375 78.78,-49.835
  rectangle net NewNet18: 84.599,-52.375 86.047,-49.835
  rectangle net NewNet18: 91.866,-52.375 93.314,-49.835
  rectangle net NewNet18: 99.133,-52.375 100.581,-49.835
  rectangle net NewNet18: 106.401,-52.375 107.848,-49.835
  rectangle net NewNet18: 113.64,-52.527 117.932,-49.759
Bottom Layer:
  rectangle net NewNet15: 42.342,8.712 117.627,11.227
  rectangle net NewNet18: 113.132,-52.476 117.577,5.182
  rectangle net NewNet18: 47.066,-52.426 115.773,-49.657
  rectangle net NewNet18: 47.066,-45.517 115.773,-43.332
  rectangle net NewNet18: 47.066,-39.192 115.773,-37.008
  rectangle net NewNet18: 47.066,-32.868 115.773,-30.683
  rectangle net NewNet18: 47.066,-26.543 115.773,-24.359
  rectangle net NewNet18: 47.066,-20.218 115.773,-18.034
  rectangle net NewNet18: 47.066,-13.894 115.773,-11.709
  rectangle net NewNet18: 47.066,-7.569 115.773,-4.75
  rectangle net NewNet18: 47.066,-1.245 115.773,0.94
  rectangle net NewNet18: 47.066,5.08 114.148,7.849
  rectangle net NewNet15: 42.316,-52.299 46.177,11.379
  rectangle net NewNet15: 43.155,-48.285 111.455,-46.431
  rectangle net NewNet15: 43.155,-41.961 111.455,-40.107
  rectangle net NewNet15: 43.155,-35.636 111.455,-33.782
  rectangle net NewNet15: 43.155,-29.312 111.455,-27.457
  rectangle net NewNet15: 43.155,-22.987 111.455,-21.133
  rectangle net NewNet15: 43.155,-16.662 111.455,-14.808
  rectangle net NewNet15: 43.155,-10.338 111.455,-8.484
  rectangle net NewNet15: 43.155,-4.013 111.455,-2.159
  rectangle net NewNet15: 43.155,1.829 111.455,4.166

## Silkscreen, mask and mechanical layers (free items; w line width, h text height)
Bottom Overlay:
  text "5V+" at 111.557,9.5 h0.8
  text "DIN" at 114.148,6.756 h0.8
  text "GND" at 114.935,0.94 h0.8
Mechanical 1:
  lines w0.127: 95.402,11.989 118.542,11.989 118.542,-52.883 41.808,-52.883 41.808,11.989 95.428,11.989